# EAGLE board Simple (EAGLE 6.6.0)
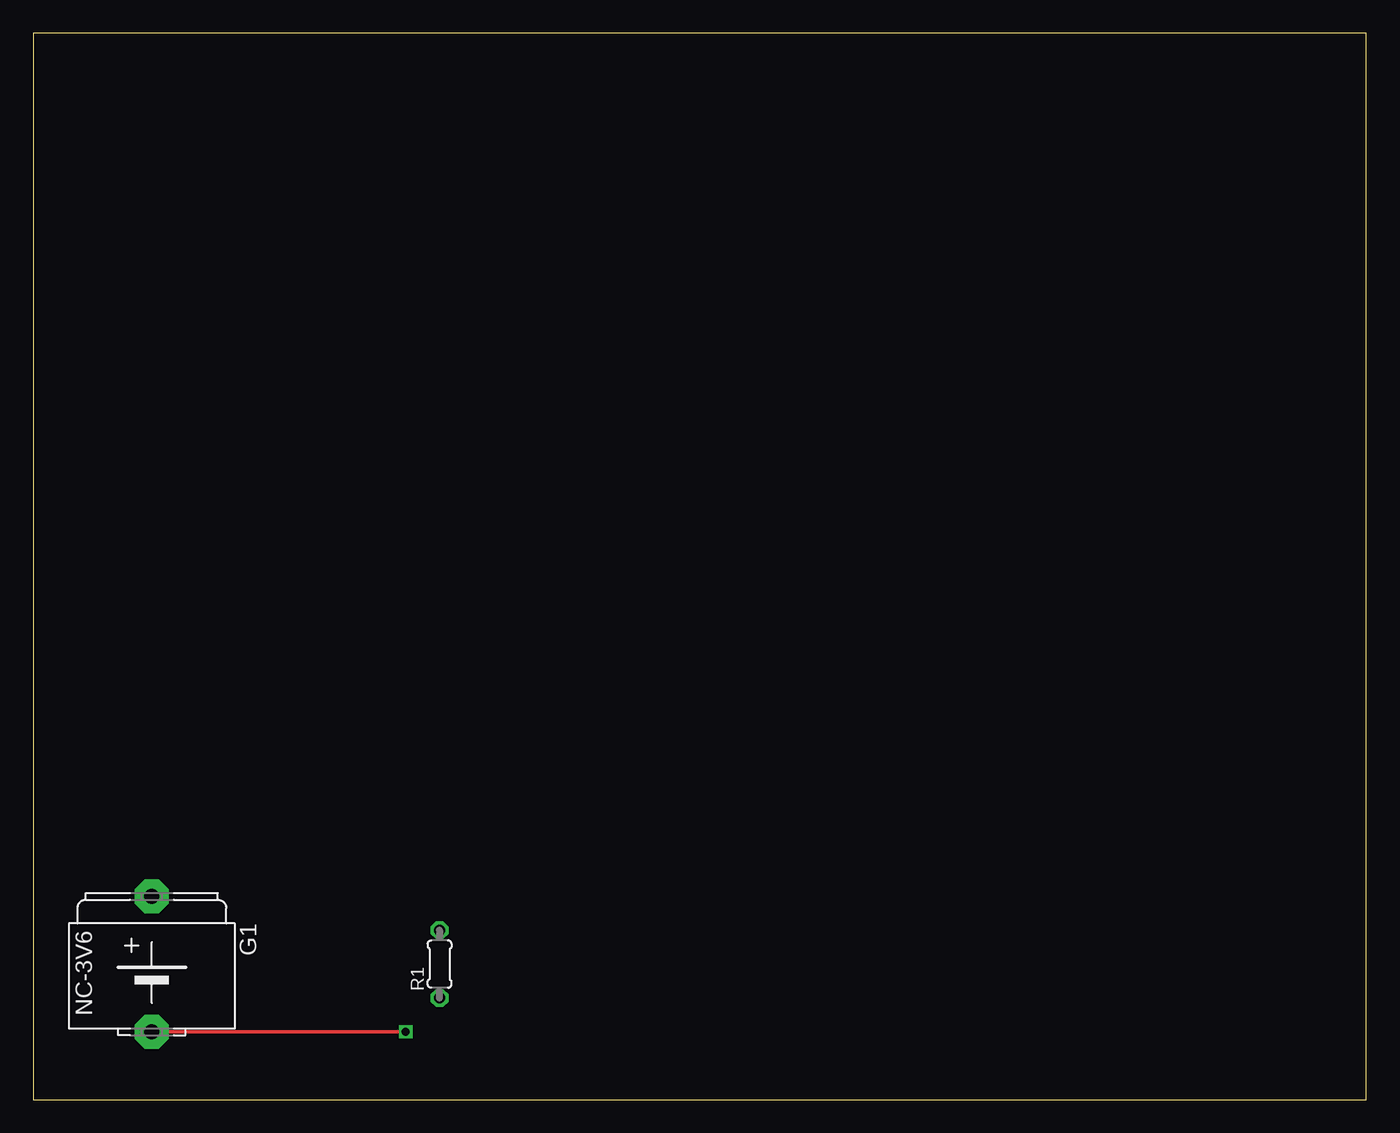
[diagram p0: board, top side]
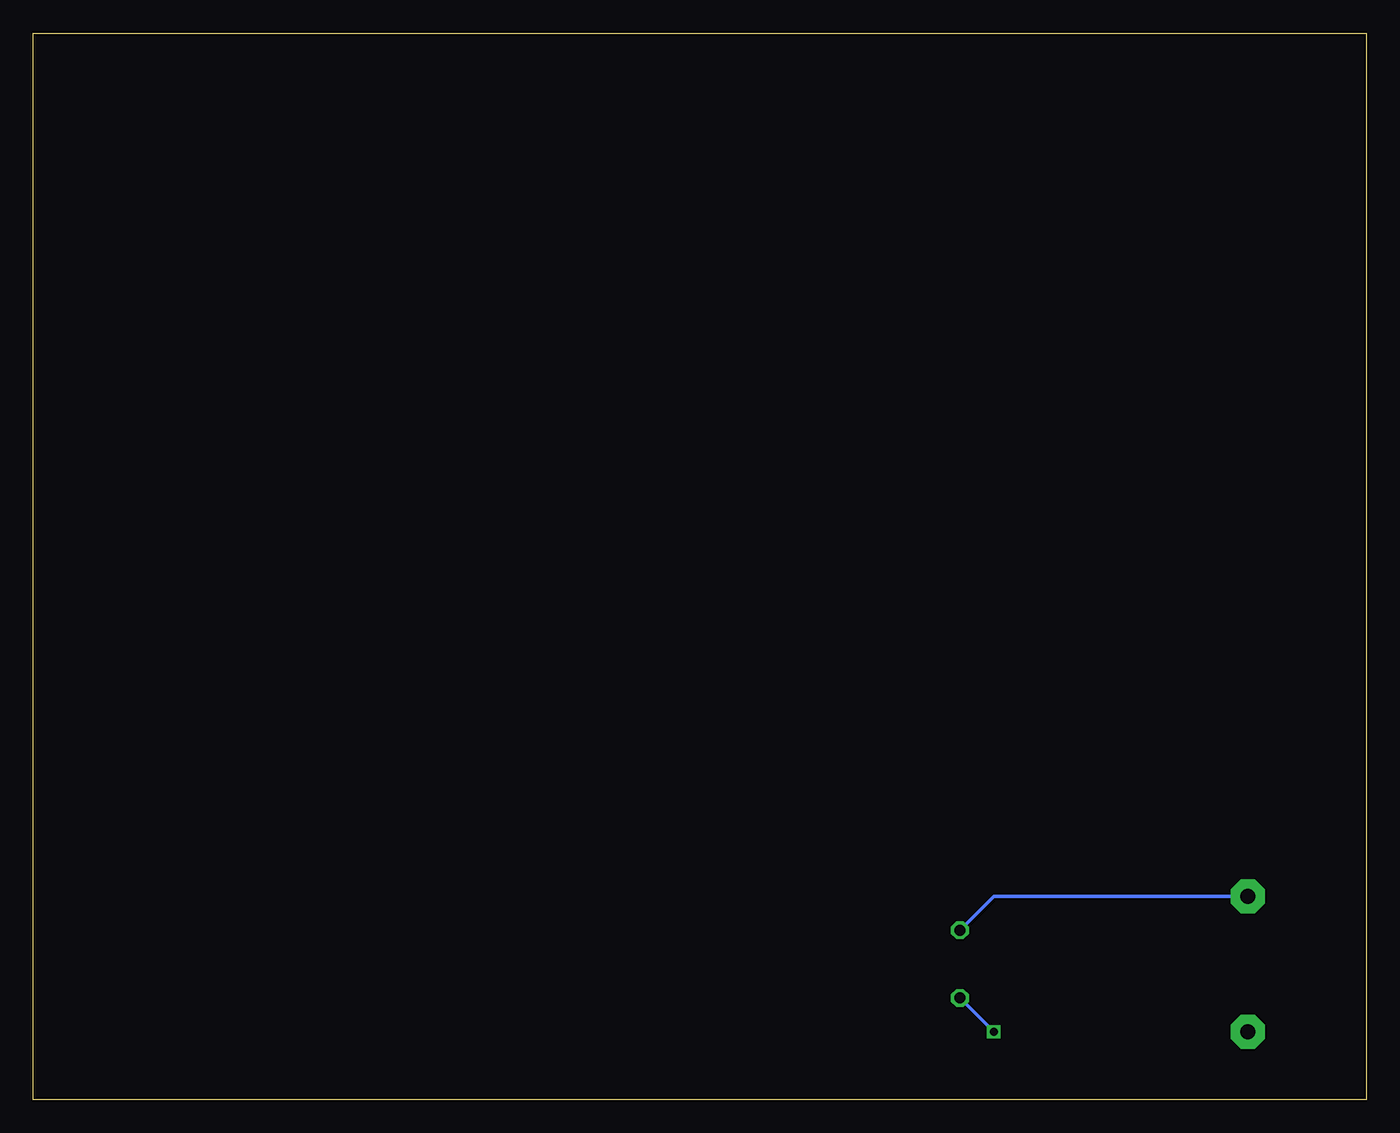
[diagram p1: board, bottom side, seen from below]

Size 100 x 80 mm. Coordinates in mm from the lower left corner, seen from the top.
Outline: 0,0 100,0 100,80 0,80 0,0
Copper layers (1*16): Top 0.035mm / dielectric 1.5mm / Bottom 0.035mm
Design rules "default": minimum track width 10mil, minimum drill 24mil, track to track 8mil, track to pad 8mil, pad to pad 8mil, via to via 8mil, smd to smd 8mil, copper to edge 40mil, drill to drill 8mil, minimum pad ring 10mil, minimum via ring 8mil, stop-mask expansion 4mil, vias tented up to drill 0mil, thermal gap 10mil

## Footprints (pad centres in the part's own frame; a part is rotated, then mirrored left to right if it is on the bottom)
3V11R = drill 1.118 pad 2.54 octagon: + -5.08,0; - 5.08,0
0204/5 = drill 0.813 octagon: 1 -2.54,0; 2 2.54,0

## Placement (x,y rotation side)
G1  3V11R  [3V11R]  8.89,10.16 270 top
R1  [0204/5]  30.48,10.16 90 top

## Library data of the parts
G1 = battery
R1 = resistor

## Nets
N$1: G1.+ R1.2
N$2: G1.- R1.1

## Tracks (layer width: path | path; a pad name or v marks a point on that pad's centre or on a via)
N$1
  Bottom 0.254: R1.2 27.94,15.24 G1.+
N$2  (via drill 0.6)
  Top 0.254: G1.- v27.94,5.08
  Bottom 0.254: v27.94,5.08 R1.1